# EAGLE board USB-Knob (EAGLE 6.4)
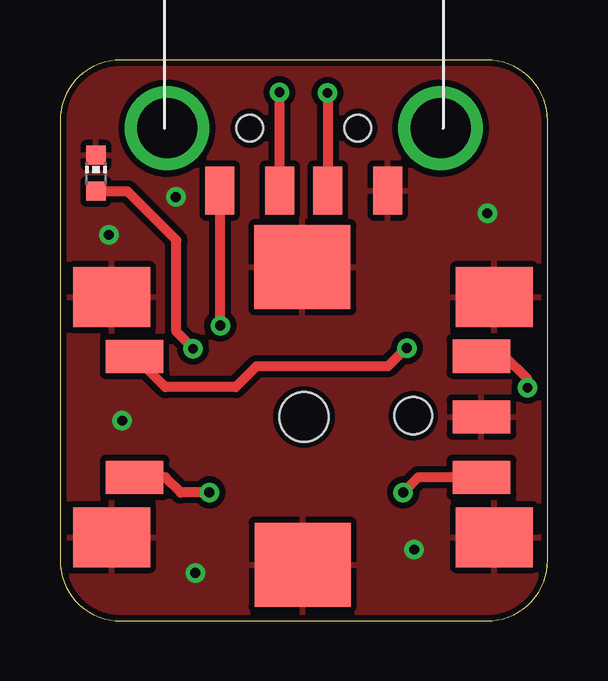
[diagram p0: board, top side]
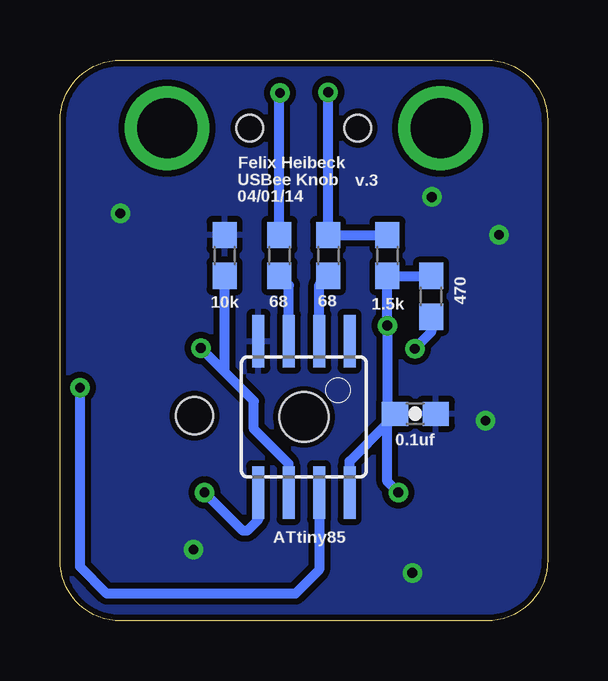
[diagram p1: board, bottom side, seen from below]

Size 20.32 x 23.39 mm. Coordinates in mm from the lower left corner, seen from the top.
Outline: 20.32,2.54 20.32,20.85 arc90 17.78,23.39 2.54,23.39 arc90 0,20.85 0,2.54 arc90 2.54,0 17.78,0 arc90 20.32,2.54
Copper layers (1*16): Top 0.035mm / dielectric 1.5mm / Bottom 0.035mm
Design rules "adafruit *": minimum track width 8mil, minimum drill 15.5mil, track to track 10mil, track to pad 10mil, pad to pad 10mil, via to via 10mil, smd to smd 8mil, copper to edge 10mil, drill to drill 8mil, minimum pad ring 10mil, minimum via ring 8mil, stop-mask expansion 4mil, vias tented up to drill 20mil, thermal gap 10mil
Net classes: 1 power: width 0.305 mm

## Footprints (pad centres in the part's own frame; a part is rotated, then mirrored left to right if it is on the bottom)
0603-CAP = smd 1.1 x 1: 1 -0.85,0; 2 0.85,0
SOIC8 = smd 0.5 x 2.2: 1 -1.905,-3.154; 2 -0.645,-3.154; 3 0.625,-3.154; 4 1.895,-3.154; 5 1.905,3.154; 6 0.635,3.154; 7 -0.635,3.154; 8 -1.905,3.154
CHIP-LED0603 = smd 0.8 x 0.8: A 0,-0.75; C 0,0.75
0603-NO = smd 1.1 x 1: 1 -0.85,0; 2 0.85,0
PEC11S = smd 1.39 x 2.4: A -2.521,-7.402; B 2.529,-7.402; C 0,-7.402; D -2.521,7.05; E 2.521,7.05 | smd 2.5 x 3.2: GND1 -5.017,8; GND2 4.99,8; GND5 -5.019,-7.937; GND6 4.989,-7.937 | smd 3.5 x 4: GND3 -6.165,0.053; GND4 6.245,0.066 | hole 2.05: 0,0 | hole 1.55: 0.054,-4.561
MOLEX_480371000 = smd 1.2 x 2: 1 3.5,2.6; 2 1,2.6; 3 -1,2.6; 4 -3.5,2.6 | drill 2.5: M1 -5.7,0; M2 5.7,0 | hole 1.1: -2.25,0; 2.25,0

## Placement (x,y rotation side)
C8  0.1uF  [0603-CAP]  5.51,8.64 0 bottom
IC3  ATTINY85-20S  [SOIC8]  10.16,8.51 180 bottom
PWR  green  [CHIP-LED0603]  1.5,18.67 0 top
R1  68 (0603)  [0603-NO]  9.14,15.24 270 bottom
R2  68 (0603)  [0603-NO]  11.18,15.24 270 bottom
R3  1.5K (0603)  [0603-NO]  6.68,15.24 270 bottom
R4  470 (0603)  [0603-NO]  4.85,13.54 90 bottom
R6  10k  [0603-NO]  13.46,15.24 270 bottom
U$1  PEC11S  [PEC11S]  10.16,8.51 90 top
X1  USB-A  [MOLEX_480371000]  10.16,20.55 180 top

## Library data of the parts
C8 = SparkFun-Capacitors
IC3 = avr
PWR X1 = adafruit
R1-R4 R6 = microbuilder
U$1 = digikey

## Nets
B0: IC3.5 U$1.A
B1: IC3.6 R6.2 U$1.E
B2: IC3.7 U$1.B
B3: IC3.2 R1.2
B4: IC3.3 R2.2
D+: R2.1 X1.3
D-: R1.1 R3.1 X1.2
GND: C8.2 IC3.4 PWR.C R6.1 U$1.C U$1.GND1 U$1.GND2 U$1.GND3 U$1.GND4 U$1.GND5 U$1.GND6 X1.4
N$6: PWR.A R4.1
RESET: IC3.1
VBUS: C8.1 IC3.8 R3.2 R4.2 U$1.D X1.1

## Tracks (layer width: path | path; a pad name or v marks a point on that pad's centre or on a via)
B0  (via drill 0.41)
  Top 0.406: U$1.A 14.93,5.99 v14.3,5.36
  Bottom 0.406: IC3.5 12.06,4.22 12.52,3.76 12.7,3.76 v14.3,5.36
B1  (via drill 0.41)
  Top 0.406: v14.45,11.38 14.43,11.38 13.66,10.62 8.18,10.62 7.31,9.75 4.39,9.75 U$1.E
  Bottom 0.406: IC3.6 10.79,6.55 12.24,8 12.24,9.17 13.44,10.36 13.46,10.39 | 13.46,10.39 R6.2 | 13.46,10.39 v14.45,11.38
B2  (via drill 0.41)
  Top 0.406: v19.48,9.73 19.48,10.08 18.52,11.05 17.57,11.05 U$1.B
  Bottom 0.406: IC3.7 9.53,2.13 10.52,1.14 18.36,1.14 19.48,2.26 v19.48,9.73
B3
  Bottom 0.406: IC3.2 9.52,14.02 R1.2
B4
  Bottom 0.406: IC3.3 10.79,14 R2.2
D+  (via drill 0.41)
  Top 0.406: 11.18,17.96 X1.3 arc-45 11.15,17.97 v11.15,22.02
  Bottom 0.406: R2.1 11.18,21.96 arc45 v11.15,22.02
D-  (via drill 0.41)
  Top 0.406: v9.14,22.05 9.14,17.96 X1.2
  Bottom 0.406: R3.1 R1.1 v9.14,22.05
GND  (via drill 0.41)
  other vias: 2.59,8.36 17.81,16.99 2.03,16.1 14.76,2.97 5.64,2.01 4.83,17.68
  pour Bottom: -9.8,23.32 -9.55,-7.54 28.27,-7.75 28.22,26.77
  pour Top: -6.25,26.95 -11.2,-6.91 25.63,-7.49 25.63,26.92
N$6  (via drill 0.41)
  Top 0.406: v5.54,11.35 5.54,11.38 4.85,12.07 4.85,15.88 4.18,16.55 3.81,16.92 2.81,17.92 PWR.A
  Bottom 0.406: R4.1 4.85,12.04 v5.54,11.35
VBUS  (via drill 0.41)
  Top 0.406: X1.1 6.66,12.34 v6.68,12.32 | v6.22,5.36 5.03,5.36 4.39,5.99 U$1.D
  Bottom 0.406: R4.2 R3.2 v6.68,12.32 6.68,8.32 | v6.23,5.35 v6.22,5.36 6.68,5.82 6.68,8.23 | 6.68,8.23 6.68,8.32 | 6.68,8.32 C8.1 | IC3.8 8.26,6.66 6.68,8.23

## Text on the board
bPlace: v.3 | Felix Heibeck | USBee Knob | 04/01/14 | 470 | 1.5k | 68 | 68 | 10k | 0.1uf | ATtiny85